# Altium PCB Negative_PCB.PcbDoc
Units mm, origin at the board's own origin, x right, y up, seen from the top; angles counter-clockwise.
Board outline 260 x 33 mm, 4 copper layers (Top Layer 1, Top Layer 2, Bottom Layer 2, Bottom Layer 1), stack 0.603 mm thick; 34 components, 36 nets, 84 pads, 30 vias.
Unrouted connection lines stored in the file: 1.
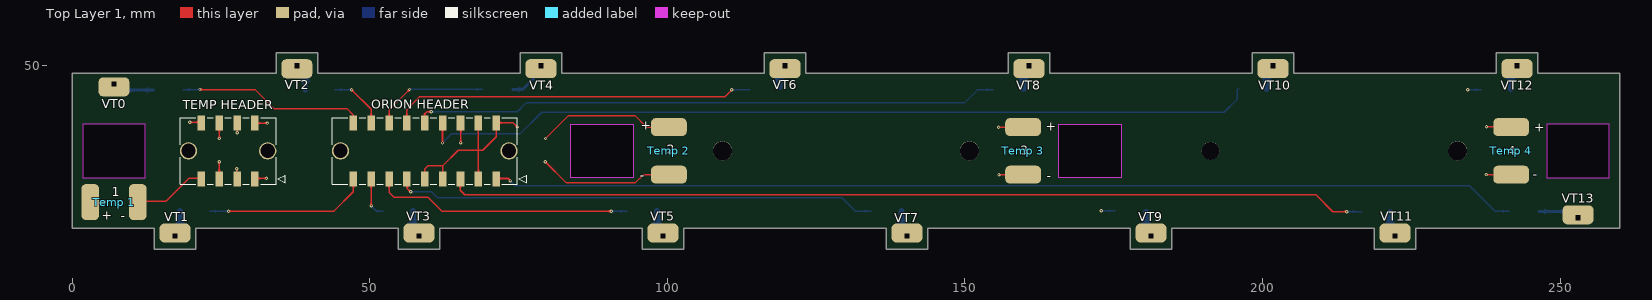
[diagram p0: Top Layer 1 view]
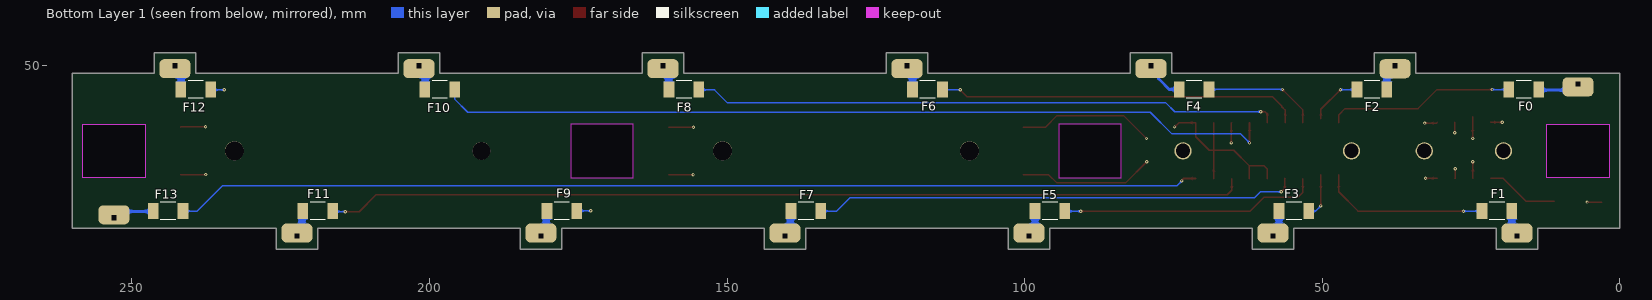
[diagram p1: Bottom Layer 1 view, seen from below]
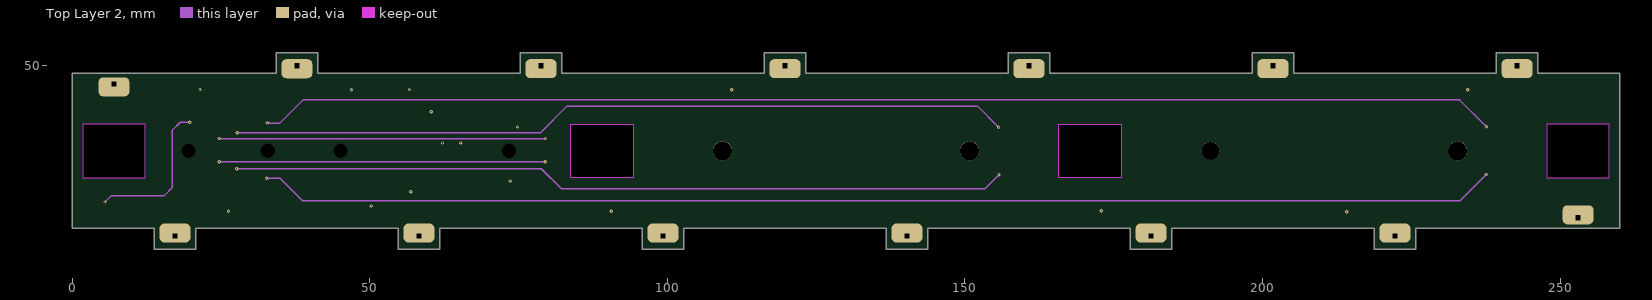
[diagram p2: Top Layer 2]
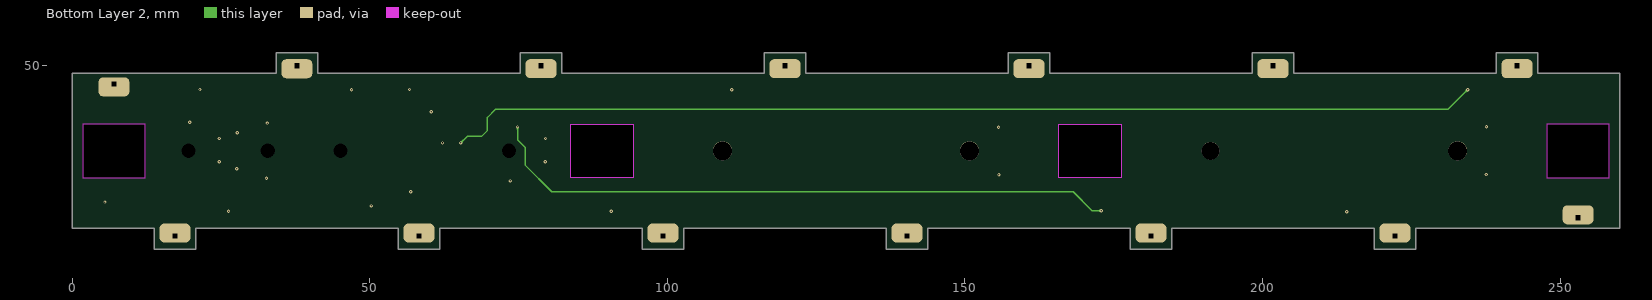
[diagram p3: Bottom Layer 2]
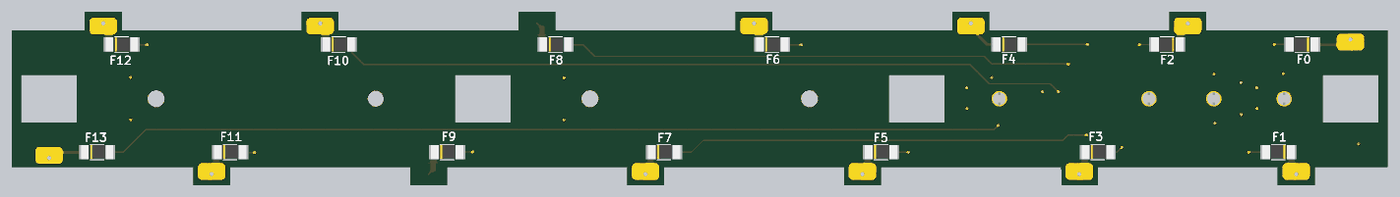
[diagram p4: 3D render of the assembled board from below, using the file's embedded part models]

## Layer stack, top to bottom
Top Solder: solder mask 0.0102, Solder Resist, Dk 3.5
Top Layer 1: signal copper 0.035
Dielectric 2: prepreg 0.0711, PP-006, Dk 4.1
Top Layer 2: signal copper 0.0356
Dielectric 1: dielectric 0.32, FR-4, Dk 4.8
Bottom Layer 2: signal copper 0.0356
Dielectric 3: prepreg 0.0711, PP-006, Dk 4.1
Bottom Layer 1: signal copper 0.035
Bottom Solder: solder mask 0.0102, Solder Resist, Dk 3.5

## Board outline
13.763,19.157 20.763,19.157 20.763,22.657 54.763,22.657 54.763,19.157 61.763,19.157 61.763,22.657 95.763,22.657 95.763,19.157 102.763,19.157 102.763,22.657 136.763,22.657 136.763,19.157 143.763,19.157 143.763,22.657 177.763,22.657 177.763,19.157 184.763,19.157 184.763,22.657 218.763,22.657 218.763,19.157 225.763,19.157 225.763,22.657 260.013,22.657 260.013,48.657 246.263,48.657 246.263,52.157 239.263,52.157 239.263,48.657 205.263,48.657 205.263,52.157 198.263,52.157 198.263,48.657 164.263,48.657 164.263,52.157 157.263,52.157 157.263,48.657 123.263,48.657 123.263,52.157 116.263,52.157 116.263,48.657 82.263,48.657 82.263,52.157 75.263,52.157 75.263,48.657 41.263,48.657 41.263,52.157 34.263,52.157 34.263,48.657 0.013,48.657 0.013,22.657 13.763,22.657
cut-out: 1.763,40.157 1.763,31.157 12.263,31.157 12.263,40.157
cut-out: 83.763,40.157 94.263,40.157 94.263,31.157 83.763,31.157
cut-out: 247.763,40.157 247.763,31.157 258.263,31.157 258.263,40.157
cut-out: 165.763,40.157 176.263,40.157 176.263,31.157 165.763,31.157

## Design rules (kind name [scope] priority, off if disabled: settings)
Clearance Clearance_1 [All] p1: gap=0.254 ignorepadtopadclearanceinfootprint=FALSE except(0: Arc-Hole Track-Hole SMDPad-Hole THPad-Hole Via-Hole Fill-Hole Poly-Hole Region-Hole Text-Hole; 0.336: Arc-Arc Arc-Track Arc-SMDPad Arc-THPad Arc-Via Arc-Fill Arc-Poly Arc-Region Track-Track Track-SMDPad Track-THPad Track-Via Track-Fill Track-Poly Track-Region)
PolygonConnect [All] p1: connectstyle=Relief reliefconductorwidth=0.254 reliefentries=4 polygonreliefangle="90 Angle" airgapwidth=0.254
RoutingVias [All] p1: holewidth=0.711 width=1.27 viastyle="Through Hole" minholewidth=0.711 minwidth=1.27 maxholewidth=0.711 maxwidth=1.27
SolderMaskExpansion [All] p1: expansion=0.102 istentingtop=FALSE
Width [All] p1: maxlimit=10 minlimit=0.257 preferedwidth=0.257 minimp=50.000000 maximp=50.000000 favimp=50.000000
30 further rules are at their usual default settings.

## Components (designator, comment, footprint, x,y, rotation, side; value= is the part's Value field where it differs from the comment)
F0 "0154.750MRL" 0451Series_LTF 16.142,45.95 r0 bottom
F1 "0154.750MRL" 0451Series_LTF 20.64,25.54 r0 bottom
F2 "0154.750MRL" 0451Series_LTF 41.66,45.95 r0 bottom
F3 "0154.750MRL" 0451Series_LTF 54.763,25.54 r180 bottom
F4 "0154.750MRL" 0451Series_LTF 71.518,45.95 r180 bottom
F5 "0154.750MRL" 0451Series_LTF 95.763,25.54 r180 bottom
F6 "0154.750MRL" 0451Series_LTF 116.32,45.95 r180 bottom
F7 "0154.750MRL" 0451Series_LTF 136.763,25.54 r180 bottom
F8 "0154.750MRL" 0451Series_LTF 157.263,45.95 r180 bottom
F9 "0154.750MRL" 0451Series_LTF 177.763,25.54 r180 bottom
F10 "0154.750MRL" 0451Series_LTF 198.263,45.95 r180 bottom
F11 "0154.750MRL" 0451Series_LTF 218.763,25.54 r180 bottom
F12 "0154.750MRL" 0451Series_LTF 239.263,45.95 r180 bottom
F13 "0154.750MRL" 0451Series_LTF 243.92,25.54 r180 bottom
"ORION HEADER" "430451815" CON_430451815_MOL 59.24,35.657 r0 top
"Temp 1" "Temp_Pins" TEMP_PINS 7.03,27.053 r0 top
"Temp 2" "temp 2" TEMP_PINS 100.263,35.657 r270 top
"Temp 3" "Temp_Pins" TEMP_PINS 159.763,35.657 r270 top
"Temp 4" "Temp_Pins" TEMP_PINS 241.763,35.657 r270 top
"TEMP HEADER" "430450815" CON_430450815_MOL 26.2,35.657 r0 top
VT0 "Voltage_Tap" VOLTAGE_TAP#1 7.013,46.907 r0 top
VT1 "Voltage_Tap" VOLTAGE_TAP#2 14.83,20.56 r90 top
VT2 "Voltage_Tap" VOLTAGE_TAP#3 45.403,46.55 r90 top
VT3 "Voltage_Tap" VOLTAGE_TAP#4 55.525,14.667 r90 top
VT4 "Voltage_Tap" VOLTAGE_TAP#5 95.213,51.447 r90 top
VT5 "Voltage_Tap" VOLTAGE_TAP#6 111.483,16.317 r90 top
VT6 "Voltage_Tap" VOLTAGE_TAP#7 128.083,54.697 r90 top
VT7 "Voltage_Tap" VOLTAGE_TAP#8 150.508,14.999 r180 top
VT8 "Voltage_Tap" VOLTAGE_TAP#9 166.483,58.613 r90 top
VT9 "Voltage_Tap" VOLTAGE_TAP#10 189.913,13.617 r90 top
VT10 "Voltage_Tap" VOLTAGE_TAP#11 193.303,51.507 r90 top
VT11 "Voltage_Tap" VOLTAGE_TAP#12 215.963,14.557 r90 top
VT12 "Voltage_Tap" VOLTAGE_TAP#13 234.213,55.937 r90 top
VT13 "Voltage_Tap" VOLTAGE_TAP#14 244.833,30.307 r90 top

## Footprints (in the part's own frame and the unit in brackets; to place one, negate y for a bottom-side part, rotate by r counter-clockwise, add the part's x,y. Pads: shape width x height; smd on the part's side, far side on the other; paste and mask are expansions set on the pad)
0451Series_LTF [mil]
  rect 71x106 smd paste+0 mask+0: 1(-98.5,0) 2(98.5,0)
  silkscreen extent -51,-58 51,58, body extent -120,-53 120,53, height 106
CON_430450815_MOL [mm]
  rect 1.27x2.54 smd paste+0 mask+0.076: 1(4.5,-4.7) 2(1.5,-4.7) 3(-1.5,-4.7) 4(-4.5,-4.7) 5(4.5,4.7) 6(1.5,4.7) 7(-1.5,4.7) 8(-4.5,4.7)
  round 2.91 / inner round 1.524 / far side round 2.91 hole 2.41 paste-1.455 mask+0.076: P1(6.65,0) P2(-6.65,0)
  silkscreen extent -8.07,-5.61 9.6,5.59, body extent -8.08,-5.61 8.08,5.59, height 9.95
CON_430451815_MOL [mm]
  rect 1.27x2.54 smd paste+0 mask+0.076: 1(12,-4.7) 2(9,-4.7) 3(6,-4.7) 4(3,-4.7) 5(0,-4.7) 6(-3,-4.7) 7(-6,-4.7) 8(-9,-4.7) 9(-12,-4.7) 10(12,4.7) 11(9,4.7) 12(6,4.7) 13(3,4.7) 14(0,4.7) 15(-3,4.7) 16(-6,4.7) 17(-9,4.7) 18(-12,4.7)
  round 2.91 / inner round 1.524 / far side round 2.91 hole 2.41 paste-1.455 mask+0.076: P1(14.15,0) P2(-14.15,0)
  silkscreen extent -15.57,-5.61 17.1,5.59, body extent -15.58,-5.61 15.58,5.59, height 9.95
TEMP_PINS [mm]
  rrect50% 3x6 smd: 1+(-4,0) 1-(4,0)
VOLTAGE_TAP#1 [mm]
  rrect50% 5.2x3.2 hole 0.8 square copper offset 0,-0.5: 1(0,0)
VOLTAGE_TAP#2 [mm]
  rrect50% 3.2x5.2 hole 0.8 square copper offset 0.5,0: 1(0.8,-2.44)
VOLTAGE_TAP#3 [mm]
  rrect50% 3.2x5.2 hole 0.8 square copper offset -0.5,0: 1(3.4,7.643)
VOLTAGE_TAP#4 [mm]
  rrect50% 3.2x5.2 hole 0.8 square copper offset 0.5,0: 3(6.688,-2.738)
VOLTAGE_TAP#5 [mm]
  rrect50% 3.2x5.2 hole 0.8 square copper offset -0.5,0: 1(-1.487,16.443)
VOLTAGE_TAP#6 [mm]
  rrect50% 3.2x5.2 hole 0.8 square copper offset 0.5,0: 1(5.033,12.223)
VOLTAGE_TAP#7 [mm]
  rrect50% 3.2x5.2 hole 0.8 square copper offset -0.5,0: 1(-4.737,8.323)
VOLTAGE_TAP#8 [mm]
  rrect50% 5.2x3.2 hole 0.8 square copper offset 0,-0.5: 1(10.248,-6.351)
VOLTAGE_TAP#9 [mm]
  rrect50% 3.2x5.2 hole 0.8 square copper offset -0.5,0: 1(-8.653,5.723)
VOLTAGE_TAP#10 [mm]
  rrect50% 3.2x5.2 hole 0.8 square copper offset 0.5,0: 1(7.743,8.643)
VOLTAGE_TAP#11 [mm]
  rrect50% 3.2x5.2 hole 0.8 square copper offset -0.5,0: 1(-1.552,-8.455)
VOLTAGE_TAP#12 [mm]
  rrect50% 3.2x5.2 hole 0.8 square copper offset 0.5,0: 1(6.803,-6.297)
VOLTAGE_TAP#13 [mm]
  rrect50% 3.2x5.2 hole 0.8 square copper offset -0.5,0: 1(-5.977,-8.547)
VOLTAGE_TAP#14 [mm]
  rrect50% 3.2x5.2 hole 0.8 square copper offset 0.5,0: 1(-5.897,-8.177)

## Part data
F0 F1 F2 F3 F4 F5 F6 F7 F8 F9 F10 F11 F12 F13: "FUSE BOARD MNT 750MA 125VAC/VDC", Digikey Part Number=F2576CT-ND, Manufacturer="Littelfuse Inc.", Digikey Link=https://www.digikey.com.au/en/products/detail/littelfuse-inc/0451-750MRL/700816, Part Number=0154.750MRL
"ORION HEADER" "TEMP HEADER": "No Description Available", Mfr_Name="Molex Connector Corporation", RefDes=RefDes, Type=Type
"Temp 2": library part Temp_Pins
VT0 VT1 VT2 VT3 VT4 VT5 VT6 VT7 VT8 VT9 VT10 VT11 VT12 VT13: library part "Voltage Tap", Angle=0, Contact=NA, Flange=No, Part Number="Voltage Tap", Pitch=0mm, Positions=1, Row Spacing=0mm

## Free pads (board coordinates)
  round 3.2 hole 3.2: "Mounting Hole"(109.263,35.657) "Mounting Hole"(150.763,35.657) "Mounting Hole"(232.763,35.657)
  round 3 hole 3: "Mounting Hole"(191.263,35.657)

## Via types
v1: diameter 0.55, hole 0.25, Top Layer 1 to Bottom Layer 1, 30 vias

## Nets (pads, with @x,y where several pads share a name; then routed paths per layer and width w, separated by ;. In a path a pad name is that pad's centre, name@x,y a point inside that pad or via, vN(x,y) a via of type N, cw(c..) or ccw(c..) an arc to the next point about the centre after c; other vN are vias at no path point)
0: "ORION HEADER.18" F0.2 | length 31.7
  Top Layer 1 w0.257: v1(21.469,45.957) 21.476,45.95 30.71,45.95 33.91,42.75 46.165,42.75 47.24,41.675 47.24,40.357
  Bottom Layer 1 w0.257: F0.2 18.65,45.957 v1(21.469,45.957)
1: "ORION HEADER.9" F1.2 | length 28.3
  Top Layer 1 w0.257: v1(26.28,25.49) 26.33,25.54 43.997,25.54 47.24,28.783 47.24,30.957 ; 47.24,31.005 47.24,31.64
  Bottom Layer 1 w0.257: F1.2 26.23,25.54 v1(26.28,25.49)
1+: "Temp 1.1+" "TEMP HEADER.8" | length 29.9
  Top Layer 1 w0.257: 3.03,27.053 v1(5.5,27.053) ; v1(19.74,40.45) 21.673,40.45 21.7,40.423
  Top Layer 2 w0.257: v1(5.5,27.053) 6.537,28.09 15.42,28.09 16.855,29.525 16.855,39.16 18.145,40.45 v1(19.74,40.45)
1-: "Temp 1.1-" "TEMP HEADER.4" | length 12.3
  Top Layer 1 w0.257: 11.03,27.15 15.71,27.15 19.59,31.03 21.7,31.03
2: "ORION HEADER.17" F2.2 | length 9
  Top Layer 1 w0.257: v1(46.94,45.93) 50.24,42.63 50.24,41.04
  Bottom Layer 1 w0.257: F2.2 44.182,45.93 v1(46.94,45.93)
2+: "Temp 2.1+" "TEMP HEADER.7" | length 81.6
  Top Layer 1 w0.257: 24.7,41.412 24.7,40.43 24.73,40.4 v1(24.73,37.74) ; v1(79.54,37.74) 83.38,41.58 94.54,41.58 96.463,39.657 100.263,39.657
  Top Layer 2 w0.257: v1(24.73,37.74) 24.75,37.72 v1@79.56,37.72
2-: "Temp 2.1-" "TEMP HEADER.3" | length 80.4
  Top Layer 1 w0.257: 24.7,31.024 v1(24.7,33.84) ; v1(79.49,33.81) 83.04,30.26 94.58,30.26 95.977,31.657 100.263,31.657
  Top Layer 2 w0.257: v1(24.7,33.84) 24.73,33.81 v1(79.49,33.81)
3: "ORION HEADER.8" F3.2 | length 7.6
  Top Layer 1 w0.257: v1(50.24,26.405) 50.24,30.957 50.24,31.64
  Bottom Layer 1 w0.257: v1(50.24,26.405) 51.105,25.54 F3.2
3+: "Temp 3.1+" "TEMP HEADER.6" | length 137.1
  Top Layer 1 w0.257: 27.7,40.423 27.72,40.403 v1(27.72,38.71) ; v1(155.65,39.61) 159.716,39.61 159.763,39.657
  Top Layer 2 w0.257: v1(27.72,38.71) 78.67,38.71 83.13,43.17 152.09,43.17 v1(155.65,39.61)
3-: "Temp 3.1-" "TEMP HEADER.2" | length 136.1
  Top Layer 1 w0.257: v1(27.67,32.65) 27.67,31.053 27.7,31.023 ; v1(155.71,31.64) 159.746,31.64 159.763,31.657
  Top Layer 2 w0.257: v1(27.67,32.65) 78.82,32.65 82.194,29.276 153.346,29.276 v1(155.71,31.64)
4: "ORION HEADER.16" F4.2 | length 19.4
  Top Layer 1 w0.257: 53.24,40.357 53.24,42.523 v1(56.687,45.97)
  Bottom Layer 1 w0.257: v1(56.687,45.97) F4.2@69.016,45.97
4+: "Temp 4.1+" "TEMP HEADER.5" | length 214.6
  Top Layer 1 w0.257: 30.7,40.43 30.804,40.326 v1(32.794,40.326) ; v1(237.62,39.7) 241.72,39.7 241.763,39.657
  Top Layer 2 w0.257: v1(32.794,40.326) 34.866,40.326 34.88,40.34 34.91,40.34 38.79,44.22 233.1,44.22 v1(237.62,39.7)
4-: "Temp 4.1-" "TEMP HEADER.1" | length 214.4
  Top Layer 1 w0.257: 30.7,31.023 30.717,31.04 v1(32.65,31.04) ; v1(237.57,31.67) 241.75,31.67 241.763,31.657
  Top Layer 2 w0.257: v1(32.65,31.04) 34.935,31.04 38.705,27.27 233.17,27.27 v1@237.557,31.657
5: "ORION HEADER.7" F5.2 | length 43.6
  Top Layer 1 w0.257: 53.24,30.957 53.24,28.7 54.08,27.86 59.772,27.86 62.122,25.51 v1(90.582,25.51)
  Bottom Layer 1 w0.257: v1(90.582,25.51) 93.231,25.51 F5.2
6: "ORION HEADER.15" F6.2 | length 61.1
  Top Layer 1 w0.257: 56.24,40.357 56.24,42.517 56.793,43.07 ; 56.793,43.184 58.329,44.72 109.63,44.72 v1(110.81,45.9)
  Bottom Layer 1 w0.257: v1(110.81,45.9) 113.768,45.9 F6.2
7: "ORION HEADER.6" F7.2 | length 81.3
  Top Layer 1 w0.257: 56.24,30.957 56.3,31.017 56.3,29.351 v1(56.874,28.777)
  Bottom Layer 1 w0.257: v1(56.874,28.777) 60.387,28.777 61.387,27.777 ; 61.387,27.774 129.346,27.774 131.58,25.54 F7.2
8: "ORION HEADER.14" F8.2 | length 98.7
  Top Layer 1 w0.257: 59.24,40.357 59.24,41.87 59.597,42.227 v1(60.327,42.227)
  Bottom Layer 1 w0.257: v1(60.327,42.227) 74.795,42.227 76.27,43.702 149.902,43.702 152.1,45.9 F8.2@154.711,45.9
9: "ORION HEADER.2" "ORION HEADER.4" "ORION HEADER.5" "ORION HEADER.10" "ORION HEADER.11" F9.2 | length 143
  Top Layer 1 w0.257: 59.24,30.957 59.24,32.61 59.757,33.127 62.24,33.127 ; 62.24,30.957 62.24,33.127 ; 68.24,30.957 68.24,35.74 ; 68.24,40.357 68.24,35.74 ; v1(74.826,39.669) 74.773,39.669 74.063,40.38 71.263,40.38 71.263,38.029 68.974,35.74 68.24,35.74 ; 62.24,33.127 64.853,35.74 68.24,35.74
  Bottom Layer 2 w0.257: v1(74.826,39.669) 74.826,37.536 76.085,36.278 76.085,33.269 80.572,28.782 168.188,28.782 171.365,25.605 172.885,25.605 v1(172.92,25.57)
  Bottom Layer 1 w0.257: v1(172.92,25.57) F9.2@175.231,25.57
10: "ORION HEADER.13" F10.2 | length 141.9
  Top Layer 1 w0.257: v1(62.22,36.981) 62.22,40.337 62.24,40.357
  Bottom Layer 1 w0.257: v1(62.22,36.981) 62.22,37.01 63.7,38.49 75.22,38.49 78.89,42.16 193.56,42.16 195.769,44.369 195.769,45.958 F10.2@195.966,46.155
11: "ORION HEADER.3" F11.2 | length 154.9
  Top Layer 1 w0.257: 65.24,30.957 65.2,30.917 65.2,29.04 65.962,28.278 208.972,28.278 211.81,25.44 v1(214.14,25.44)
  Bottom Layer 1 w0.257: v1(214.14,25.44) F11.2@216.69,25.44
12: "ORION HEADER.12" F12.2 | length 179.8
  Top Layer 1 w0.257: 65.24,40.357 65.286,40.311 v1(65.286,36.981)
  Bottom Layer 2 w0.257: v1(65.286,36.981) 65.286,37 66.366,38.08 68.76,38.08 69.76,39.08 69.76,41.267 71.159,42.666 231.206,42.666 v1(234.45,45.91)
  Bottom Layer 1 w0.257: v1(234.45,45.91) F12.2@236.721,45.91
13: "ORION HEADER.1" F13.2 | length 172.5
  Top Layer 1 w0.257: 71.24,30.957 71.293,31.01 73.307,31.01 73.534,30.783 73.534,30.663 v1(73.59,30.607)
  Bottom Layer 1 w0.257: v1(73.59,30.607) 74.407,29.79 234.77,29.79 239.02,25.54 F13.2
NetF0_1: F0.1 VT0.1 | length 7.1
  Bottom Layer 1 w0.5: VT0.1 8.05,45.87 F0.1@13.64,45.87
NetF1_1: F1.1 VT1.1 | length 5.7
  Top Layer 1 w0.257: VT1.1 VT1.1@18.109,22.199
  Bottom Layer 1 w0.257: VT1.1 VT1.1@18.138,22.228
  Bottom Layer 1 w1: VT1.1@18.138,22.228 F1.1
NetF2_1: F2.1 VT2.1 | length 4.6
  Bottom Layer 1 w0.257: VT2.1 VT2.1@39.158,48.552
  Bottom Layer 1 w1: F2.1 VT2.1@39.158,48.552
NetF3_1: F3.1 VT3.3 | length 6
  Top Layer 1 w0.257: VT3.3@57.295,22.323 VT3.3
  Bottom Layer 1 w0.257: VT3.3@57.265,22.354 VT3.3
  Bottom Layer 1 w1: VT3.3@57.265,22.354 F3.1
NetF4_1: F4.1 VT4.1 | length 6.8
  Bottom Layer 1 w0.257: VT4.1@77.474,48.664 VT4.1
  Bottom Layer 1 w0.5: F4.1@74.024,45.974 75.711,45.974 77.362,47.625 ; 77.474,47.738 VT4.1@77.474,48.664
NetF5_1: F5.1 VT5.1 | length 4.5
  Bottom Layer 1 w0.257: VT5.1@98.342,22.268 VT5.1
  Bottom Layer 1 w1: VT5.1@98.265,22.345 F5.1
NetF6_1: F6.1 VT6.1 | length 4
  Top Layer 1 w0.257: VT6.1@118.822,49.022 VT6.1
  Bottom Layer 1 w1: F6.1@118.822,46.344 VT6.1@118.822,49.022
NetF7_1: F7.1 VT7.1 | length 4.6
  Bottom Layer 1 w0.257: VT7.1@139.35,22.26 VT7.1
  Bottom Layer 1 w1: VT7.1@139.35,22.26 F7.1@139.35,25.54
NetF8_1: F8.1 VT8.1 | length 4.3
  Bottom Layer 1 w0.257: VT8.1@159.819,49.019 VT8.1
  Bottom Layer 1 w1: F8.1@159.819,46.004 VT8.1@159.819,49.019
NetF9_1: F9.1 VT9.1 | length 4.7
  Bottom Layer 1 w0.257: F9.1@180.205,25.6 F9.1@180.38,25.425 ; VT9.1@180.38,22.25 VT9.1
  Bottom Layer 1 w1: VT9.1@180.38,22.25 F9.1@180.38,25.425
NetF10_1: F10.1 VT10.1 | length 4.4
  Top Layer 1 w0.257: VT10.1@200.691,48.888 VT10.1
  Bottom Layer 1 w1: F10.1@200.691,46.024 VT10.1@200.691,48.888
NetF11_1: F11.1 VT11.1 | length 4.4
  Bottom Layer 1 w0.257: VT11.1@221.419,22.201 VT11.1
  Bottom Layer 1 w1: VT11.1@221.419,22.201 F11.1@221.419,25.385
NetF12_1: F12.1 VT12.1 | length 4.4
  Top Layer 1 w0.257: VT12.1@241.695,48.895 VT12.1
  Bottom Layer 1 w1: F12.1@241.695,46.02 VT12.1@241.695,48.895
NetF13_1: F13.1 VT13.1 | length 7
  Top Layer 1 w0.257: VT13.1@251.95,25.47 VT13.1
  Bottom Layer 1 w0.5: F13.1@246.422,25.47 VT13.1@251.95,25.47
pads on no net: "ORION HEADER.P1" "ORION HEADER.P2" "TEMP HEADER.P1" "TEMP HEADER.P2"

## Silkscreen, mask and mechanical layers (free items; w line width, h text height)
Top Overlay:
  text "+" at 95.524,39.19 h1.52
  text "+" at 163.584,39.05 h1.52
  text "+" at 245.604,38.86 h1.52
  text "2" at 99.914,35.144 h1.52
  text "3" at 159.254,34.964 h1.52
  text "4" at 241.214,34.924 h1.52
  text "-" at 245.434,30.992 h1.52
  text "-" at 95.324,30.842 h1.52
  text "-" at 163.734,30.702 h1.52
  text "1" at 6.634,28.014 h1.52
  text "+" at 4.964,24.06 h1.52
  text "-" at 8.164,23.962 h1.52
Mechanical 1:
  lines w0.254: 54.763,22.657 54.763,19.157 61.763,19.157 ; 56.763,21.057 56.763,21.657 ; 95.763,19.157 102.763,19.157 ; 177.763,22.657 177.763,19.157 ; 179.763,21.057 179.763,21.657 ; 184.763,22.657 184.763,19.157 177.763,19.157 ; 225.763,22.657 260.013,22.657 ; 177.763,19.157 177.763,19.157
  lines w0.257: 54.763,22.657 20.763,22.657 20.763,19.157 13.763,19.157 13.763,22.657 0.013,22.657 0.013,48.657 34.263,48.657 34.263,52.157 41.263,52.157 41.263,48.657 75.263,48.657 75.263,52.157 82.263,52.157 82.263,48.657 116.263,48.657 116.263,52.157 123.263,52.157 123.263,48.657 157.263,48.657 157.263,52.157 164.263,52.157 164.263,48.657 198.263,48.657 198.263,52.157 205.263,52.157 205.263,48.657 239.263,48.657 239.263,52.157 246.263,52.157 246.263,48.657 260.013,48.657 260.013,22.657 ; 56.763,21.057 59.763,21.057 59.763,21.657 56.763,21.657 ; 61.763,19.157 61.763,22.657 95.763,22.657 95.763,19.157 ; 102.763,19.157 102.763,22.657 136.763,22.657 136.763,19.157 143.763,19.157 143.763,22.657 177.763,22.657 ; 179.763,21.057 182.763,21.057 182.763,21.657 179.763,21.657 ; 184.763,22.657 218.763,22.657 218.763,19.157 225.763,19.157 225.763,22.657 ; 1.763,31.157 12.263,31.157 12.263,40.157 1.763,40.157 1.763,31.157 ; 5.513,46.657 8.513,46.657 8.513,47.157 5.513,47.157 5.513,46.657 ; 15.763,21.057 15.763,21.657 18.763,21.657 18.763,21.057 15.763,21.057 ; 36.263,49.657 39.263,49.657 39.263,50.257 36.263,50.257 36.263,49.657 ; 77.263,49.657 80.263,49.657 80.263,50.257 77.263,50.257 77.263,49.657 ; 83.763,31.157 83.763,40.157 94.263,40.157 94.263,31.157 83.763,31.157 ; 97.763,21.057 97.763,21.657 100.763,21.657 100.763,21.057 97.763,21.057 ; 118.263,49.657 121.263,49.657 121.263,50.257 118.263,50.257 118.263,49.657 ; 138.763,21.057 138.763,21.657 141.763,21.657 141.763,21.057 138.763,21.057 ; 159.263,49.657 162.263,49.657 162.263,50.257 159.263,50.257 159.263,49.657 ; 165.763,31.157 176.263,31.157 176.263,40.157 165.763,40.157 165.763,31.157 ; 200.263,49.657 203.263,49.657 203.263,50.257 200.263,50.257 200.263,49.657 ; 220.763,21.057 220.763,21.657 223.763,21.657 223.763,21.057 220.763,21.057 ; 241.263,49.657 244.263,49.657 244.263,50.257 241.263,50.257 241.263,49.657 ; 247.763,31.157 258.263,31.157 258.263,40.157 247.763,40.157 247.763,31.157 ; 251.513,24.157 251.513,24.657 254.513,24.657 254.513,24.157 251.513,24.157